# Altium PCB VCC_VDD.PcbDoc
Units mil, origin at the board's own origin, x right, y up, seen from the top; angles counter-clockwise.
Board outline 1910 x 3340 mil, 2 copper layers (Top Layer, Bottom Layer); 6 components, 2 nets, 36 pads, 0 vias.
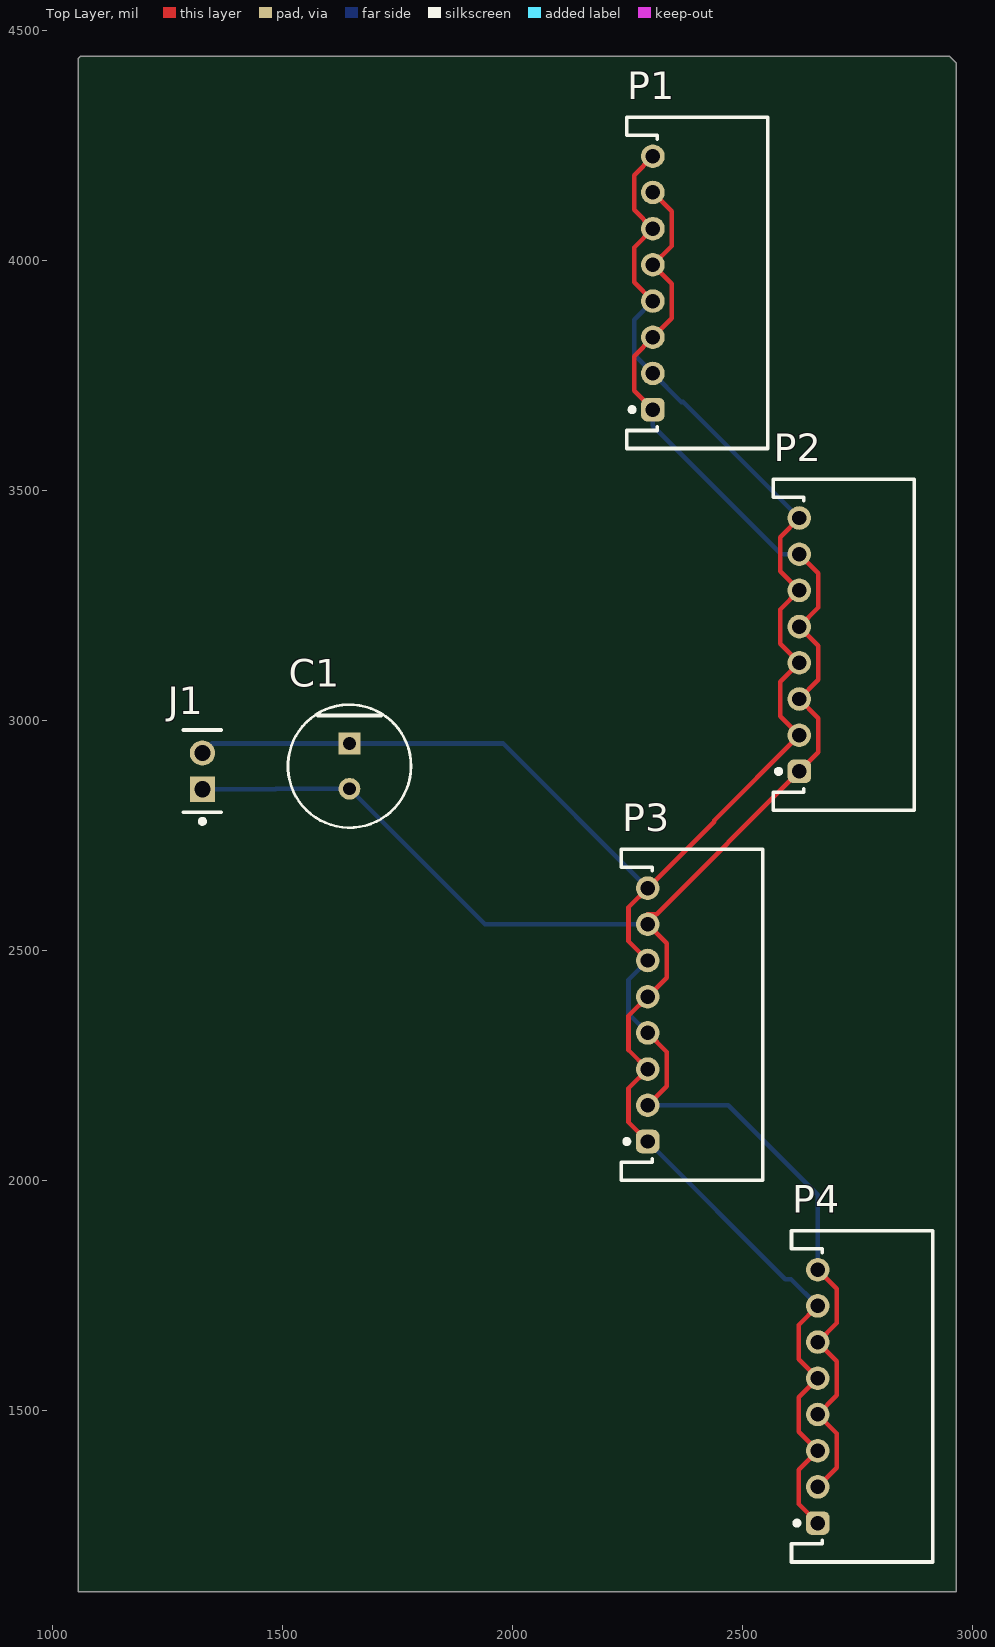
[diagram p0: Top Layer view]
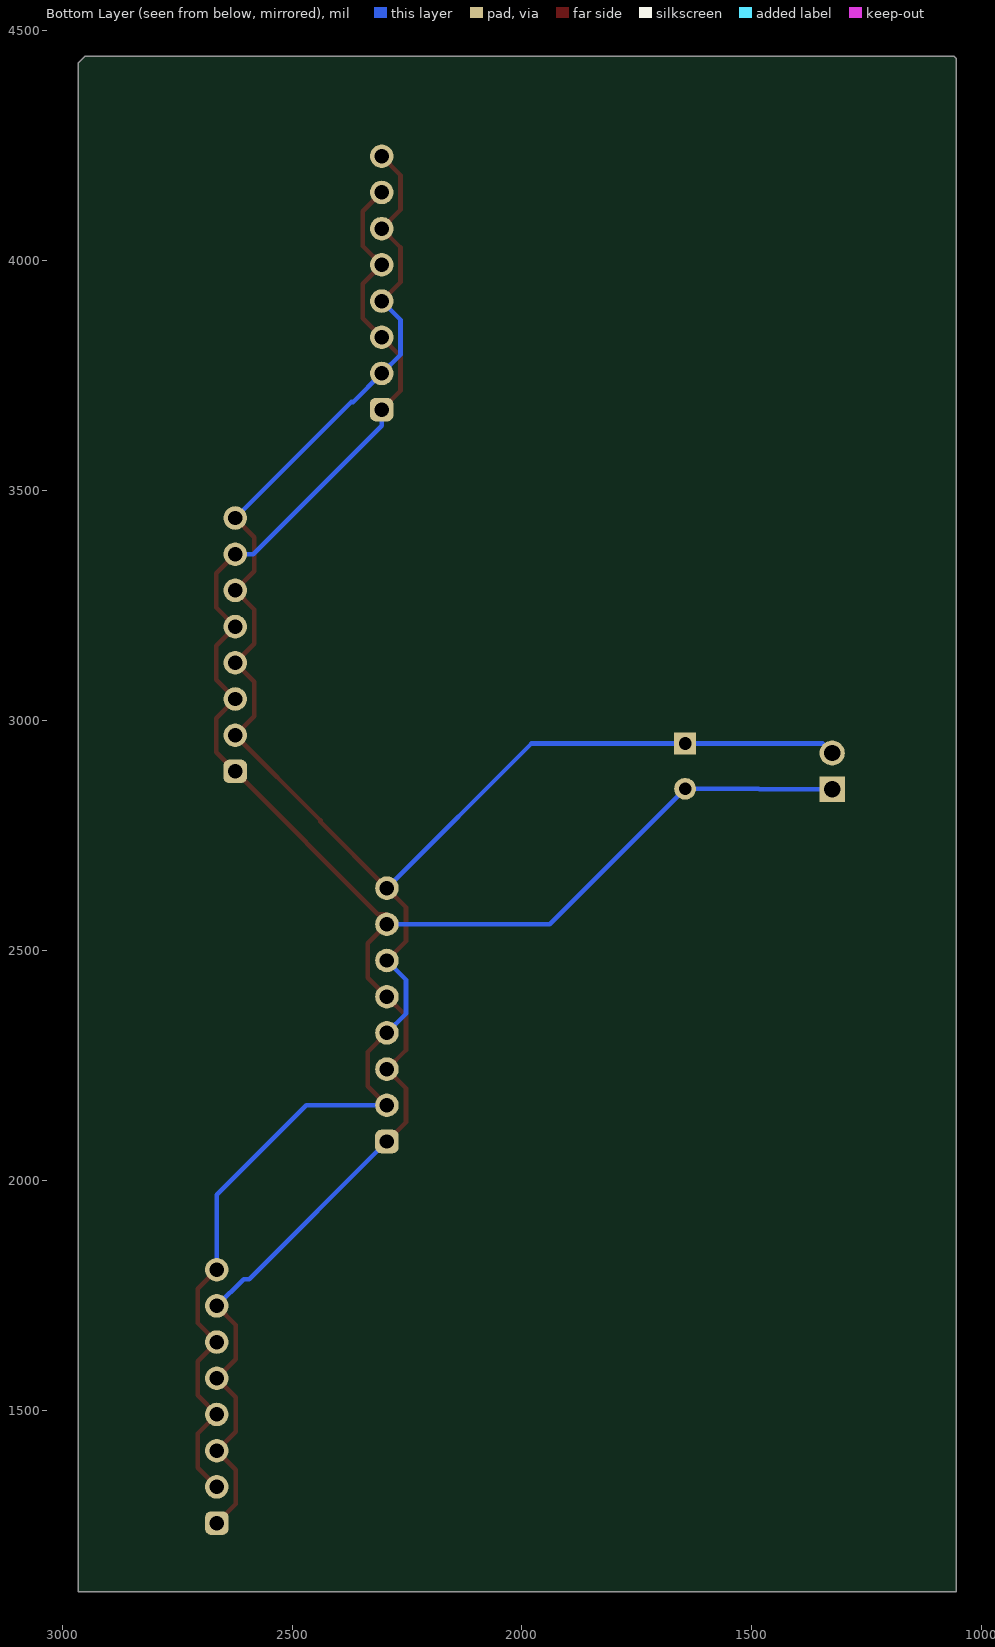
[diagram p1: Bottom Layer view, seen from below]
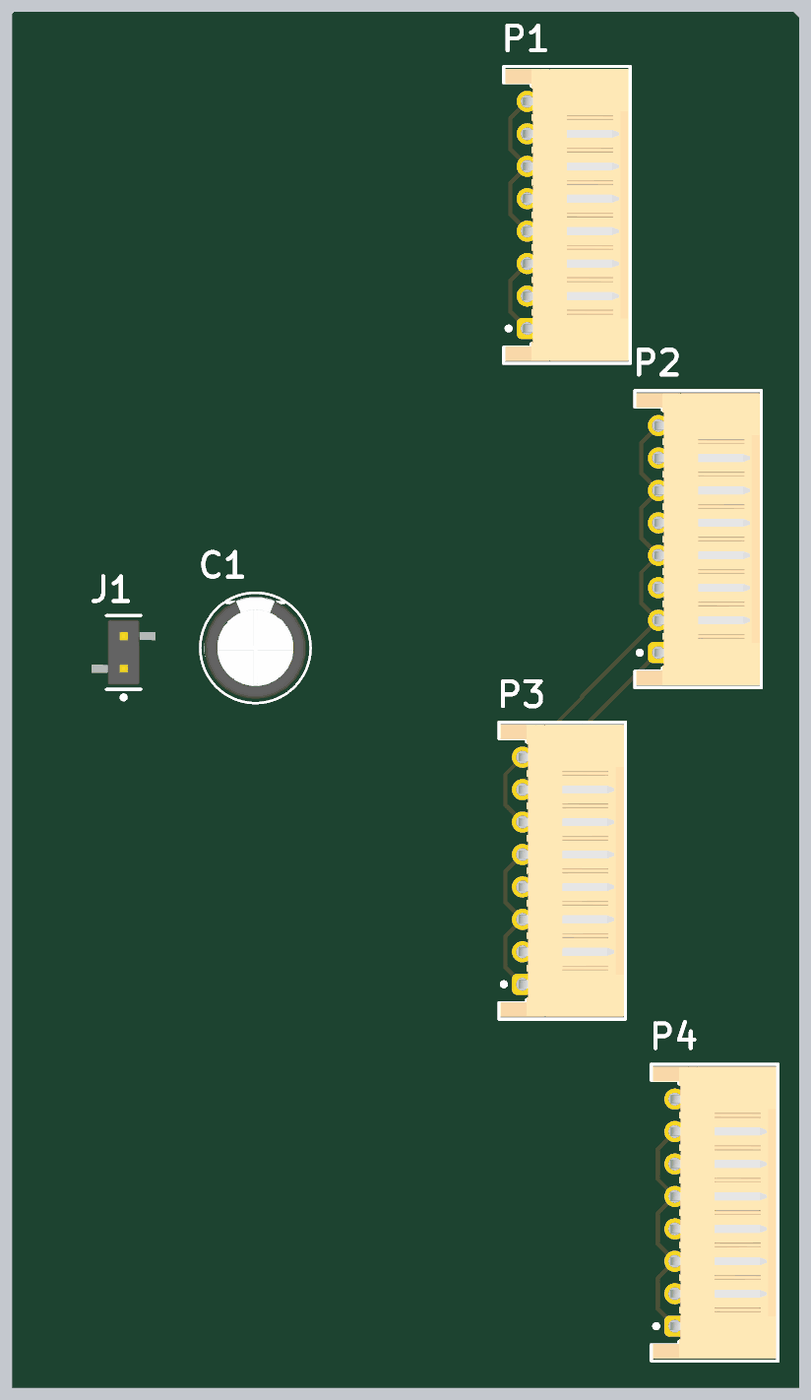
[diagram p2: 3D render of the assembled board from above, using the file's embedded part models]

## Layer stack, top to bottom
Top Solder: solder mask 0.4, Solder Resist, Dk 3.5
Top Layer: signal copper 1.4
Dielectric 1: dielectric 12.6, FR-4, Dk 4.8
Bottom Layer: signal copper 1.4
Bottom Solder: solder mask 0.4, Solder Resist, Dk 3.5

## Board outline
1055,1105 2965,1105 2965,4430 2950,4445 1060,4445 1055,4440

## Design rules (kind name [scope] priority, off if disabled: settings)
Clearance [All] p1: gap=10 ignorepadtopadclearanceinfootprint=FALSE
PolygonConnect [All] p1: connectstyle=Relief reliefconductorwidth=10 reliefentries=4 polygonreliefangle="90 Angle" airgapwidth=10
RoutingVias [All] p1: holewidth=28 width=50 viastyle="Through Hole" minholewidth=28 minwidth=50 maxholewidth=28 maxwidth=50
SolderMaskExpansion [All] p1: expansion=0 istentingtop=FALSE
Width [All] p1: maxlimit=10 minlimit=10 preferedwidth=10
30 further rules are at their usual default settings.

## Components (designator, comment, footprint, x,y, rotation, side; value= is the part's Value field where it differs from the comment)
C1 "100uF" FP-RAD-TH-D_6_3_0_5-L_11-MFG 1645,2900.79 r270 top
J1 "TMM-102-03-L-S" FP-TMM-102-03-L-S-MFG 1325,2890 r90 top
P1 "" 62000811722 2401.46,3951.89 r90 top
P2 "" 62000811722 2720,3165 r90 top
P3 "" 62000811722 2390,2360 r90 top
P4 "" 62000811722 2760,1530 r90 top

## Footprints (in the part's own frame and the unit in brackets; to place one, negate y for a bottom-side part, rotate by r counter-clockwise, add the part's x,y. Pads: shape width x height; smd on the part's side, far side on the other; paste and mask are expansions set on the pad)
62000811722 [mm] "2.00mm Male Horizontal Shrouded Header, 8p"
  rrect50% 1.3x1.3 hole 0.8: 1(-7,2.45)
  round 1.3 hole 0.8: 2(-5,2.45) 3(-3,2.45) 4(-1,2.45) 5(1,2.45) 6(3,2.45) 7(5,2.45) 8(7,2.45)
  silkscreen extent -9.15,-3.9 9.15,3.9, body extent -9,-3.8 9,3.8, height 4.83
FP-RAD-TH-D_6_3_0_5-L_11-MFG [mm]
  rect 1.2x1.2 hole 0.7 paste-2539.97 mask+0: 1(-1.25,0)
  round 1.2 hole 0.7 paste-2539.97 mask+0: 2(1.25,0)
  silkscreen extent -3.4,-3.4 3.4,3.4, body extent -3.5,-3.5 3.5,3.5, height 0.25
FP-TMM-102-03-L-S-MFG [mm]
  rect 1.39x1.39 hole 0.89 paste-2539.97 mask+0: 1(-1,0)
  round 1.39 hole 0.89 paste-2539.97 mask+0: 2(1,0)
  silkscreen extent -2.9,-1.05 2.27,1.05, body extent -2.1,-2.07 2.1,2.07, height 0.25

## Part data
C1: library part CMP-05427-000856-1, "Aluminum Electrolytic Capacitors (Radial Lead Type) 100uF ±20% 25V", Case/Package=Radial, ESR (Equivalent Series Resistance)=130mR, Max Operating Temperature=105°C, Min Operating Temperature=-40°C, Package Quantity=2000, Ripple Current=455mA, Tolerance=20%, Voltage Rating=25V, Capacitance=100uF, Diameter=6mm, Height - Seated (Max)=0.5inch, Impedance=130mR, Lead Diameter=0.5mm, Lead Pitch=5mm, Length=11mm, Life (Hours)=2000Hour, Mount="Through Hole", Packaging="Tape and Reel", Polarity=Polar, RoHS Compliant=Yes, Series=FM, Termination=Radial, Voltage Rating (DC)=25V
J1: library part CMP-02766-001502-1, "CONN HEADER 2POS SNGL 2MM T/H", Color=Black, Max Current Rating=3.9A, Max Operating Temperature=125°C, Max Voltage Rating (AC)=500V, Min Operating Temperature=-55°C, Package Quantity=1, Connector Type=Header, Contact Finish - Mating=GOLD, Contact Material=Bronze, Contact Mating Length=0.157inch, Contact Plating=Gold, Contact Shape=Square, Contact Type="Male Pin", Depth=1.97mm, Fastening Type=Pull, Gender=Male, Housing Color=Black, Housing Material=Polymer, Insulation Color=Black, Insulation Material=Polymer, Lead Free="Lead Free", Length=4mm, Mount="Through Hole", Number of Contacts=2, Number of Positions=2, Number of Rows=1, Orientation=Straight, Packaging=Bulk, Pitch=2mm, Radiation Hardening=No, REACH SVHC="No SVHC", RoHS Compliant=Yes, Series=TMM, Termination=Solder
P1 P2 P3 P4: library part CMP-1502-00657-3, "WR-WTB Wire-to-Board Connectors 2.00 mm", Current Rating=2A, Insulation Resistance=1GΩ, Max Operating Temperature=85°C, Min Operating Temperature=-25°C, Contact Plating=Tin, Gender=Male, Length=18mm, Number of Pins=8, Pitch=2mm

## Nets (pads, with @x,y where several pads share a name; then routed paths per layer and width w, separated by ;. In a path a pad name is that pad's centre, name@x,y a point inside that pad or via, vN(x,y) a via of type N, cw(c..) or ccw(c..) an arc to the next point about the centre after c; other vN are vias at no path point)
NetC1_1: C1.1 J1.2 P1.2 P1.4 P1.6 P1.8 P2.2 P2.4 P2.6 P2.8 P3.2 P3.4 P3.6 P3.8 P4.2 P4.4 P4.6 P4.8 | length 4940
  Top Layer w10: P3.2 2335,2204.61 2335,2279.17 P3.4 ; P3.6 2252,2519.65 2252,2594.05 P3.8 2438,2780.05 2438,2782.61 P2.2 2582,3009.69 2582,3084.09 P2.4 2582,3167.17 2582,3241.57 P2.6 2582,3324.65 2582,3399.05 P2.8 ; P1.4 2264,3953.52 2264,4029 P1.6 2264,4111 2264,4186.48 P1.8 ; P4.2 2705,1374.61 2705,1449.17 P4.4 2705,1532.09 2705,1606.65 P4.6 2705,1689.57 2705,1764.13 P4.8
  Bottom Layer w10: J1.2 1345.63,2950 C1.1 1979.13,2950 P3.8 ; P3.2 2468.85,2163.15 2663.54,1968.46 P4.8 ; P3.4 2252,2362.17 2252,2436.57 P3.6 ; P1.4 2264,3871.52 2264,3796.04 P1.2 2367.04,3693 2371.13,3693 P2.8
NetC1_2: C1.2 J1.1 P1.1 P1.3 P1.5 P1.7 P2.1 P2.3 P2.5 P2.7 P3.1 P3.3 P3.5 P3.7 P4.1 P4.3 P4.5 P4.7 | length 4860.4
  Top Layer w10: P3.1 2252,2125.95 2252,2200.35 P3.3 2252,2283.43 2252,2357.83 P3.5 2335,2440.83 2335,2515.39 P3.7 2293.54,2579 2313.13,2579 P2.1 2665,2930.87 2665,3005.43 P2.3 2665,3088.35 2665,3162.91 P2.5 2665,3245.83 2665,3320.39 P2.7 ; P1.1 2264,3717.3 2264,3792.78 P1.3 2346,3874.78 2346,3950.26 P1.5 2346,4032.26 2346,4107.74 P1.7 ; P4.1 2622,1295.95 2622,1370.35 P4.3 2622,1453.43 2622,1527.83 P4.5 2622,1610.91 2622,1685.31 P4.7
  Bottom Layer w10: J1.1 1484,2850.63 1484.94,2851.57 C1.2 1939.72,2556.85 P3.7 ; P3.1 2592.95,1785 2605.39,1785 P4.7 ; P1.1 2305,3641 2584.15,3361.85 P2.7

## Silkscreen, mask and mechanical layers (free items; w line width, h text height)
Mechanical 1:
  the board outline again, w10